# Altium PCB sodomach.PcbDoc
Units mil, origin at the board's own origin, x right, y up, seen from the top; angles counter-clockwise.
Board outline 2362.2 x 1968.5 mil, 2 copper layers (Top Layer, Bottom Layer); 9 components, 15 nets, 48 pads, 0 vias.
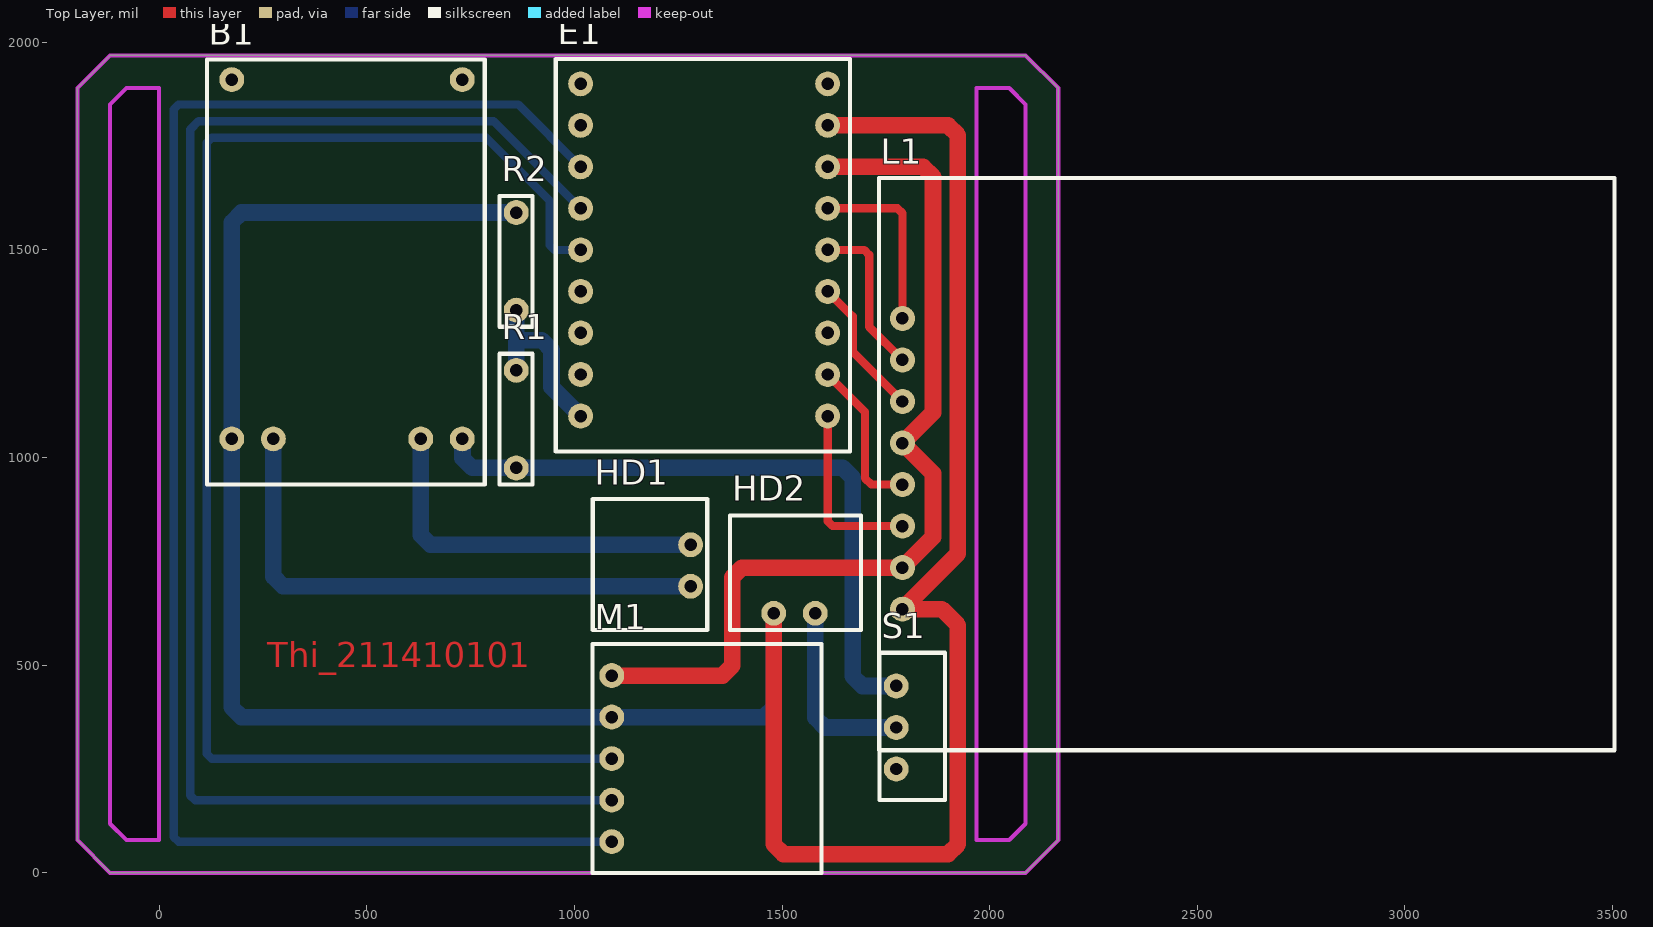
[diagram p0: Top Layer view]
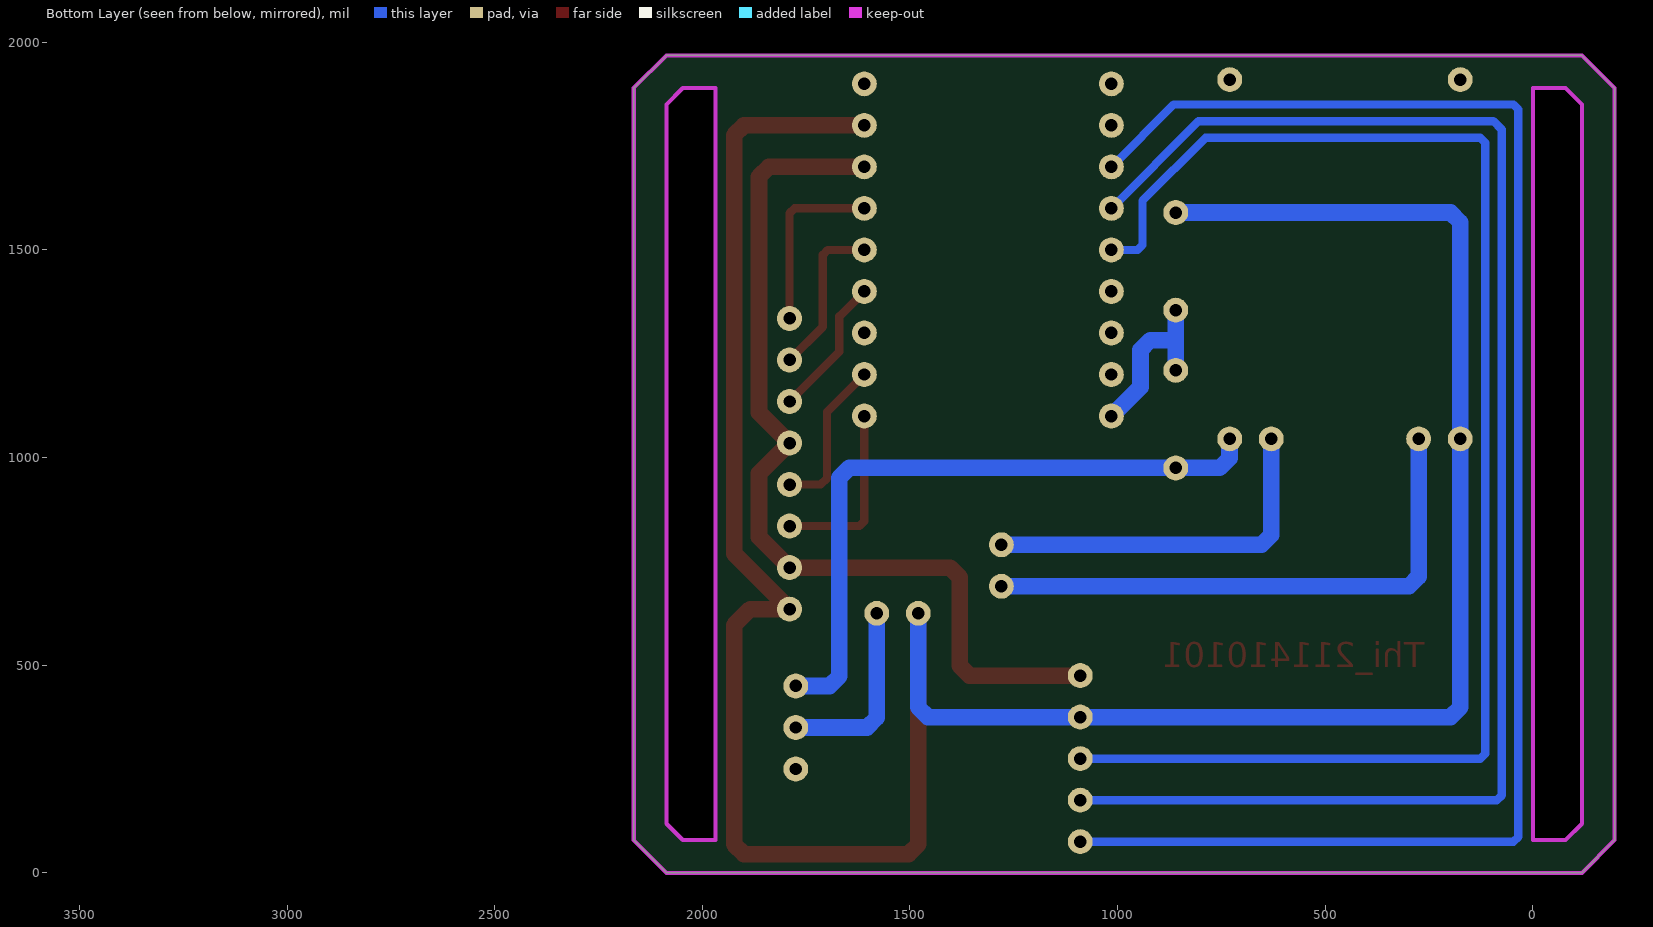
[diagram p1: Bottom Layer view, seen from below]

## Layer stack, top to bottom
Top Solder: solder mask 0.4, Solder Resist, Dk 3.5
Top Layer: signal copper 1.4
Dielectric 1: dielectric 12.6, FR-4, Dk 4.8
Bottom Layer: signal copper 1.4
Bottom Solder: solder mask 0.4, Solder Resist, Dk 3.5

## Board outline
-118.11,0 -196.85,78.74 -196.85,1889.76 -118.11,1968.5 2086.61,1968.5 2165.35,1889.76 2165.35,78.74 2086.61,0
cut-out: 1968.5,78.74 1968.5,1889.76 2047.24,1889.76 2086.61,1850.39 2086.61,118.11 2047.24,78.74
cut-out: -78.74,78.74 -118.11,118.11 -118.11,1850.39 -78.74,1889.76 0,1889.76 0,78.74

## Design rules (kind name [scope] priority, off if disabled: settings)
Clearance [All] p1: gap=20 ignorepadtopadclearanceinfootprint=FALSE
PolygonConnect [All] p1: connectstyle=Relief reliefconductorwidth=10 reliefentries=4 polygonreliefangle="90 Angle" airgapwidth=10
RoutingVias [All] p1: holewidth=28 width=50 viastyle="Through Hole" minholewidth=28 minwidth=50 maxholewidth=28 maxwidth=50
SolderMaskExpansion [All] p1: expansion=4 istentingtop=FALSE
SupplyNets "Schematic Supply Nets" [InNet('GND')] p1: voltage=0.000
Width analog [InNet('Analog')] p1: maxlimit=40 minlimit=40 preferedwidth=40
Width hd2 [InNet('NetHD2_1')] p2: maxlimit=40 minlimit=40 preferedwidth=40
Width B1_5 [InNet('NetB1_5')] p3: maxlimit=40 minlimit=40 preferedwidth=40
Width B1_4 [InNet('NetB1_4')] p4: maxlimit=40 minlimit=40 preferedwidth=40
Width B1_3 [InNet('NetB1_3')] p5: maxlimit=40 minlimit=40 preferedwidth=40
Width B1_2 [InNet('NetB1_2')] p6: maxlimit=40 minlimit=40 preferedwidth=40
Width GND [InNet('GND')] p7: maxlimit=40 minlimit=40 preferedwidth=40
Width VCC [InNet('VCC')] p8: maxlimit=40 minlimit=40 preferedwidth=40
Width [All] p9: maxlimit=20 minlimit=20 preferedwidth=20
30 further rules are at their usual default settings.

## Components (designator, comment, footprint, x,y, rotation, side; value= is the part's Value field where it differs from the comment)
B1 "tp4056" tp4056 115,935 r0 top
E1 "esp32s3" esp32s3 955,1015 r0 top
HD1 "header" header 1320,585 r90 top
HD2 "header" header 1375,585 r0 top
L1 "gc9a01" gc9a01 3505,295 r90 top
M1 "max30102" max30102 1595,0 r90 top
R1 "res" res 820,1250 r270 top
R2 "res" res 820,1630 r270 top
S1 "switch" switch 1735,530 r270 top

## Footprints (in the part's own frame and the unit in brackets; to place one, negate y for a bottom-side part, rotate by r counter-clockwise, add the part's x,y. Pads: shape width x height; smd on the part's side, far side on the other; paste and mask are expansions set on the pad)
esp32s3 [mil]
  round 60 hole 30: 0(60,885) 1(60,785) 2(60,685) 3(60,585) 4(60,485) 5(60,385) 6(60,285) 7(60,185) 8(60,85) 9(655,85) 10(655,185) 11(655,285) 12(655,385) 13(655,485) 14(655,585) 15(655,685) 16(655,785) 17(655,885)
  silkscreen extent 0,0 709,945
gc9a01 [mil]
  round 60 hole 30: 0(340,1715) 1(440,1715) 2(540,1715) 3(640,1715) 4(740,1715) 5(840,1715) 6(940,1715) 7(1040,1715)
  silkscreen extent 0,0 1378,1772
header [mil]
  round 60 hole 30: 0(105,40) 1(205,40)
  silkscreen extent 0,0 315,276
max30102 [mil]
  round 60 hole 30: 0(75,505) 1(175,505) 2(275,505) 3(375,505) 4(475,505)
  silkscreen extent 0,0 551,551
res [mil]
  round 60 hole 30: 0(40,40) 1(275,40)
  silkscreen extent 0,0 315,79
switch [mil]
  round 60 hole 30: 0(80,40) 1(180,40) 2(280,40)
  silkscreen extent 0,0 354,157
tp4056 [mil]
  round 60 hole 30: 0(60,975) 1(615,975) 2(60,110) 3(160,110) 4(515,110) 5(615,110)
  silkscreen extent 0,0 669,1024

## Nets (pads, with @x,y where several pads share a name; then routed paths per layer and width w, separated by ;. In a path a pad name is that pad's centre, name@x,y a point inside that pad or via, vN(x,y) a via of type N, cw(c..) or ccw(c..) an arc to the next point about the centre after c; other vN are vias at no path point)
Analog: E1.8 R1.0 R2.1 | length 427.8
  Bottom Layer w40: R1.0 860,1282.5 ; R2.1 860,1282.5 ; E1.8 945,1170 945,1259.07 921.57,1282.5 860,1282.5
GND: B1.2 E1.16 HD2.0 L1.0 M1.3 R2.0 | length 6630.9
  Top Layer w40: HD2.0 1480,68.43 1503.43,45 1900.07,45 1923.5,68.43 1923.5,596.57 1885.07,635 L1.0 1923.5,768.5 1923.5,1776.57 1900.07,1800 E1.16
  Bottom Layer w40: R2.0 198.43,1590 175,1566.57 175,398.43 198.43,375 M1.3 1456.57,375 1480,398.43 HD2.0
NetB1_3: B1.3 HD1.0 | length 1346.3
  Bottom Layer w40: B1.3 275,713.43 298.43,690 HD1.0
NetB1_4: B1.4 HD1.1 | length 891.3
  Bottom Layer w40: B1.4 630,813.43 653.43,790 HD1.1
NetB1_5: B1.5 R1.1 S1.0 | length 1598.4
  Bottom Layer w40: B1.5 730.71,1044.29 730.71,998.43 754.14,975 R1.1 1646.57,975 1670,951.57 1670,473.43 1693.43,450 S1.0
NetE1_2: E1.2 M1.0 | length 3858.4
  Bottom Layer w20: E1.2 865,1850 46.72,1850 35,1838.28 35,86.72 46.72,75 M1.0
NetE1_3: E1.3 M1.1 | length 3658.3
  Bottom Layer w20: E1.3 805,1810 95.15,1810 75,1789.85 75,186.72 86.72,175 M1.1
NetE1_4: E1.4 M1.2 | length 3530.6
  Bottom Layer w20: E1.4 951.72,1500 940,1511.72 940,1618.43 788.43,1770 126.72,1770 115,1758.28 115,286.72 126.72,275 M1.2
NetE1_9: E1.9 L1.2 | length 438.1
  Top Layer w20: E1.9 1610,846.72 1621.72,835 L1.2
NetE1_10: E1.10 L1.3 | length 383.5
  Top Layer w20: E1.10 1700,1110 1700,950 1715,935 L1.3
NetE1_12: E1.12 L1.5 | length 339.6
  Top Layer w20: E1.12 1670,1340 1670,1255 L1.5
NetE1_13: E1.13 L1.6 | length 391.3
  Top Layer w20: E1.13 1698.28,1500 1710,1488.28 1710,1315 L1.6
NetE1_14: E1.14 L1.7 | length 438.1
  Top Layer w20: E1.14 1778.28,1600 1790,1588.28 L1.7
NetHD2_1: HD2.1 S1.1 | length 456.3
  Bottom Layer w40: HD2.1 1580,373.43 1603.43,350 S1.1
VCC: E1.15 L1.1 L1.4 M1.4 | length 2228.7
  Top Layer w40: M1.4 1356.57,475 1380,498.43 1380,711.57 1403.43,735 L1.1 1863.5,808.5 1863.5,961.5 L1.4 1863.5,1108.5 1863.5,1676.57 1840.07,1700 E1.15
pads on no net: B1.0 B1.1 E1.0 E1.1 E1.5 E1.6 E1.7 E1.11 E1.17 S1.2

## Keep-outs
Keep-Out Layer:
  lines w10: -78.74,1889.76 -118.11,1850.39 -118.11,118.11 -78.74,78.74 0,78.74 0,1889.76 -78.74,1889.76 ; -78.74,1889.76 -78.74,1889.76 ; 2047.24,78.74 2086.61,118.11 2086.61,1850.39 2047.24,1889.76 1968.5,1889.76 1968.5,78.74 2047.24,78.74 ; 2047.24,78.74 2047.24,78.74 ; -196.85,78.74 -118.11,0 0,0 1968.5,0 2086.61,0 2165.35,78.74 2165.35,1889.76 2086.61,1968.5 1968.5,1968.5 0,1968.5 -118.11,1968.5 -196.85,1889.76 -196.85,78.74

## Other copper
Top Layer:
  text "Thi_211410101" at 260,495 h60